# Altium PCB test.PcbDoc
Units mil, origin at the board's own origin, x right, y up, seen from the top; angles counter-clockwise.
Board outline 3937.01 x 6430.71 mil, 4 copper layers (Top Layer, Layer 2, Layer 3, Bottom Layer), stack 62.449 mil thick; 27 components, 27 nets, 265 pads, 32 vias.
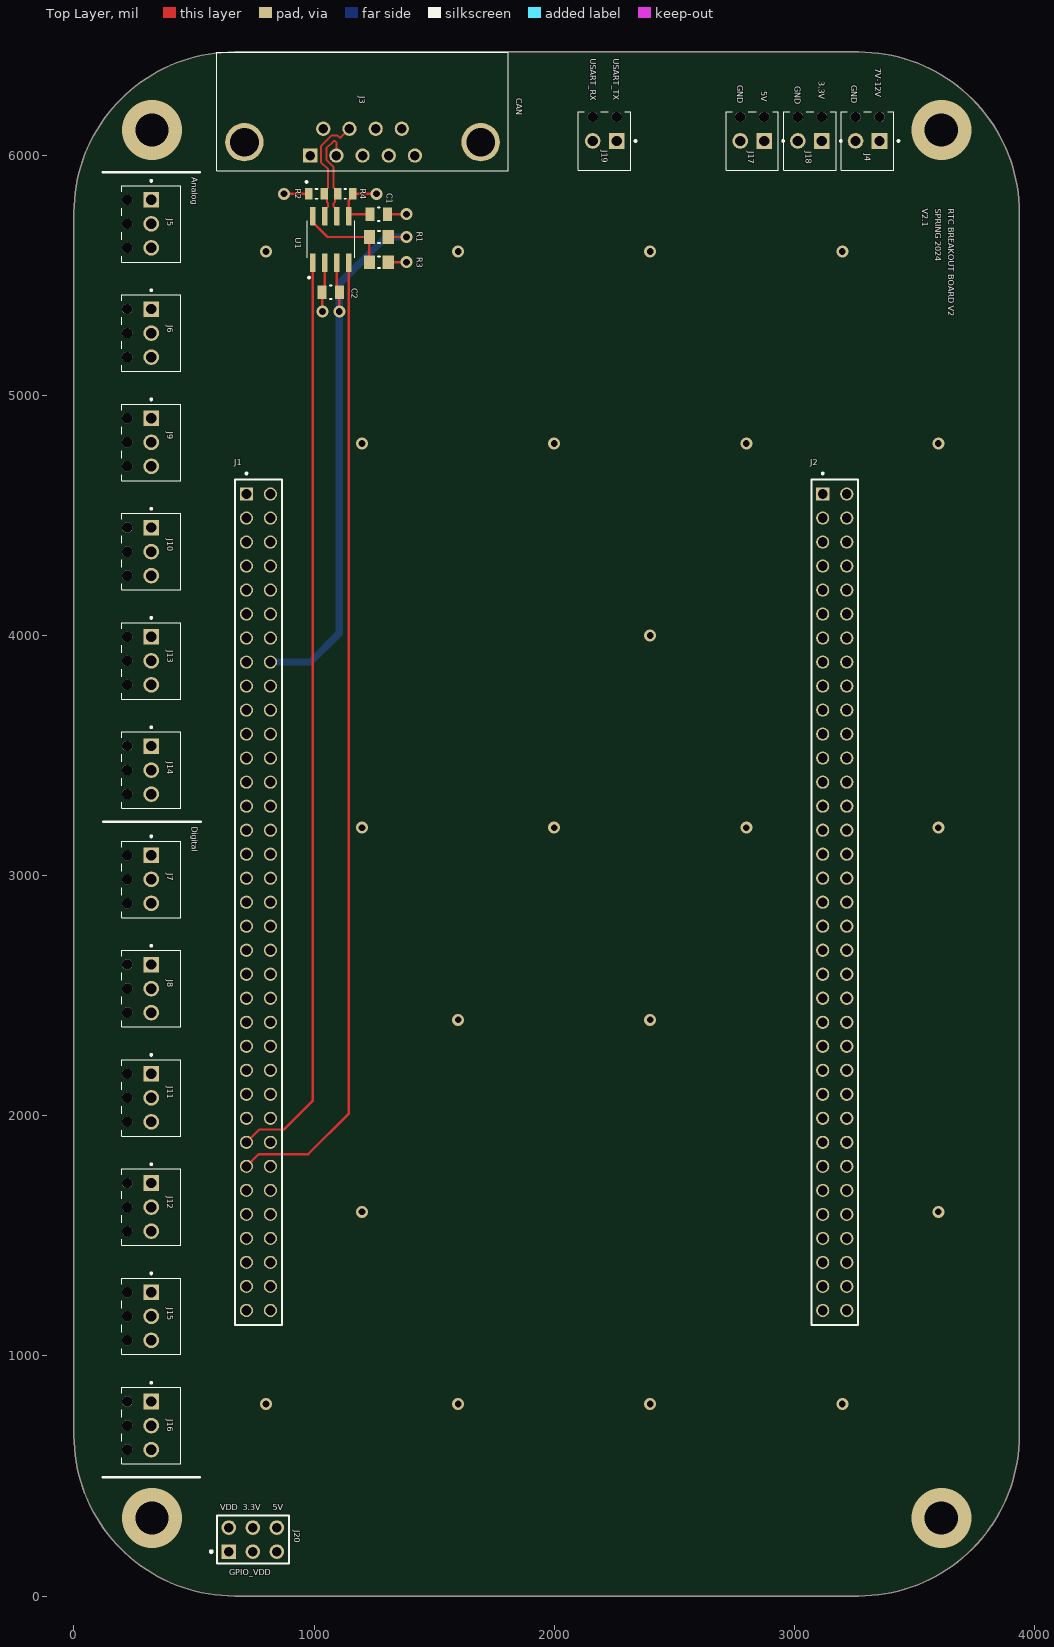
[diagram p0: Top Layer view]
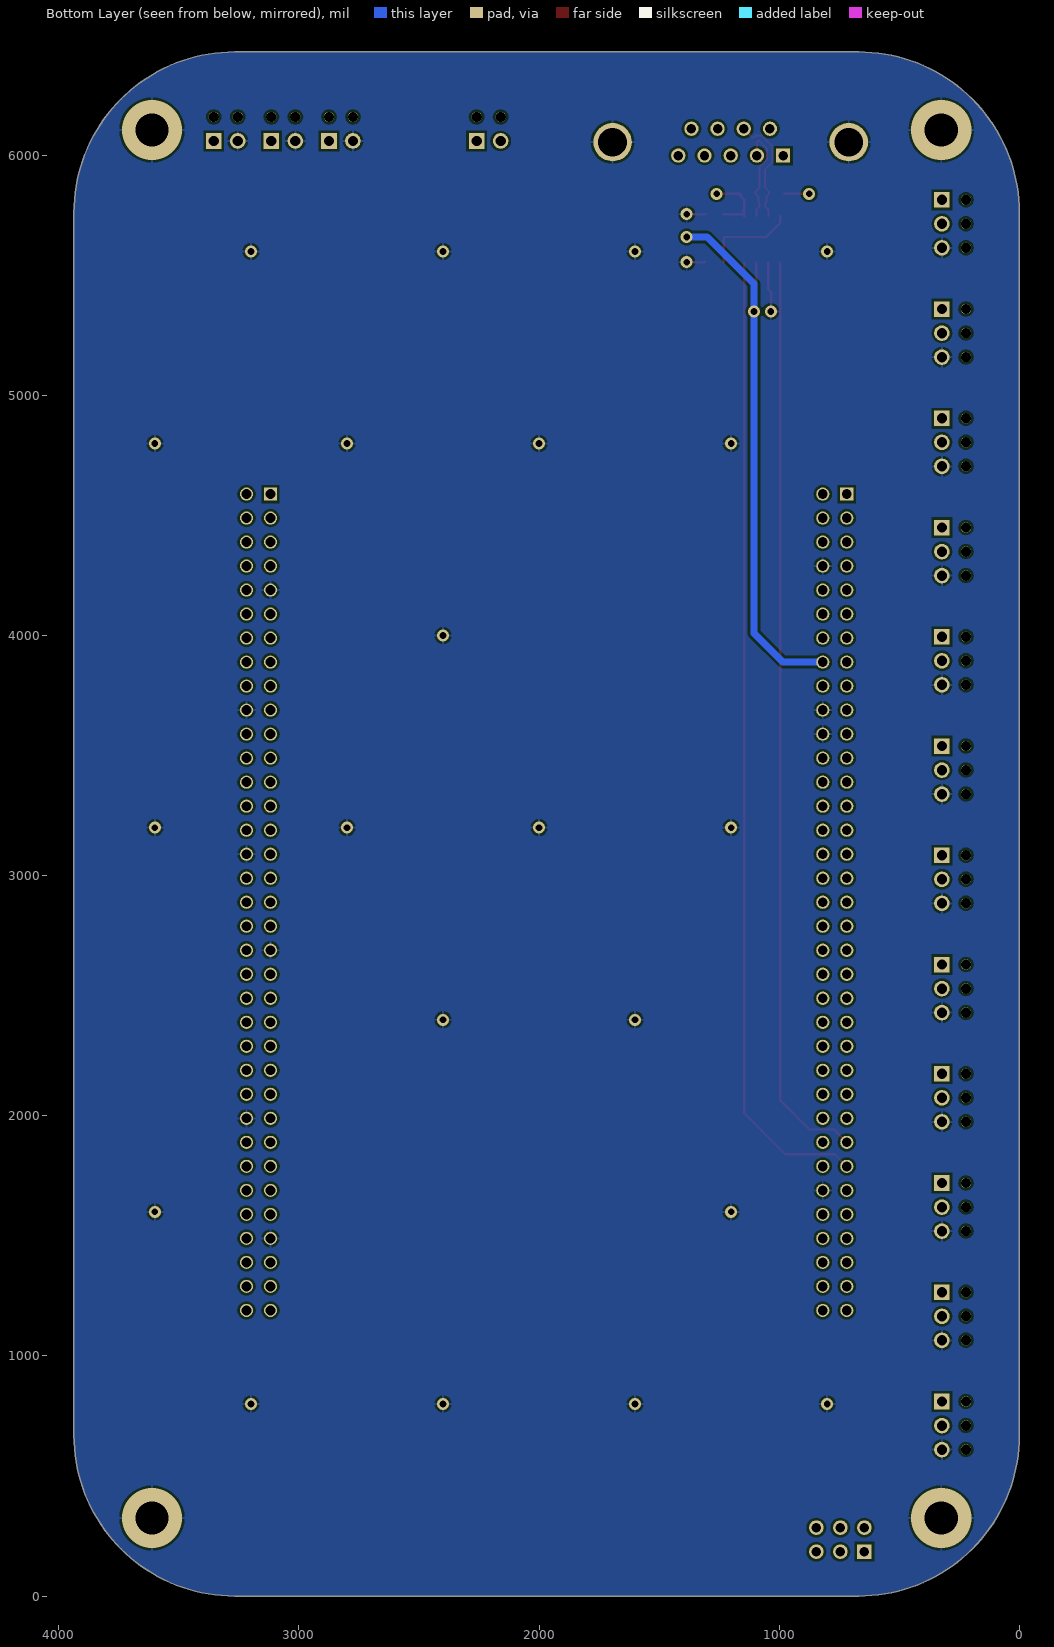
[diagram p1: Bottom Layer view, seen from below]
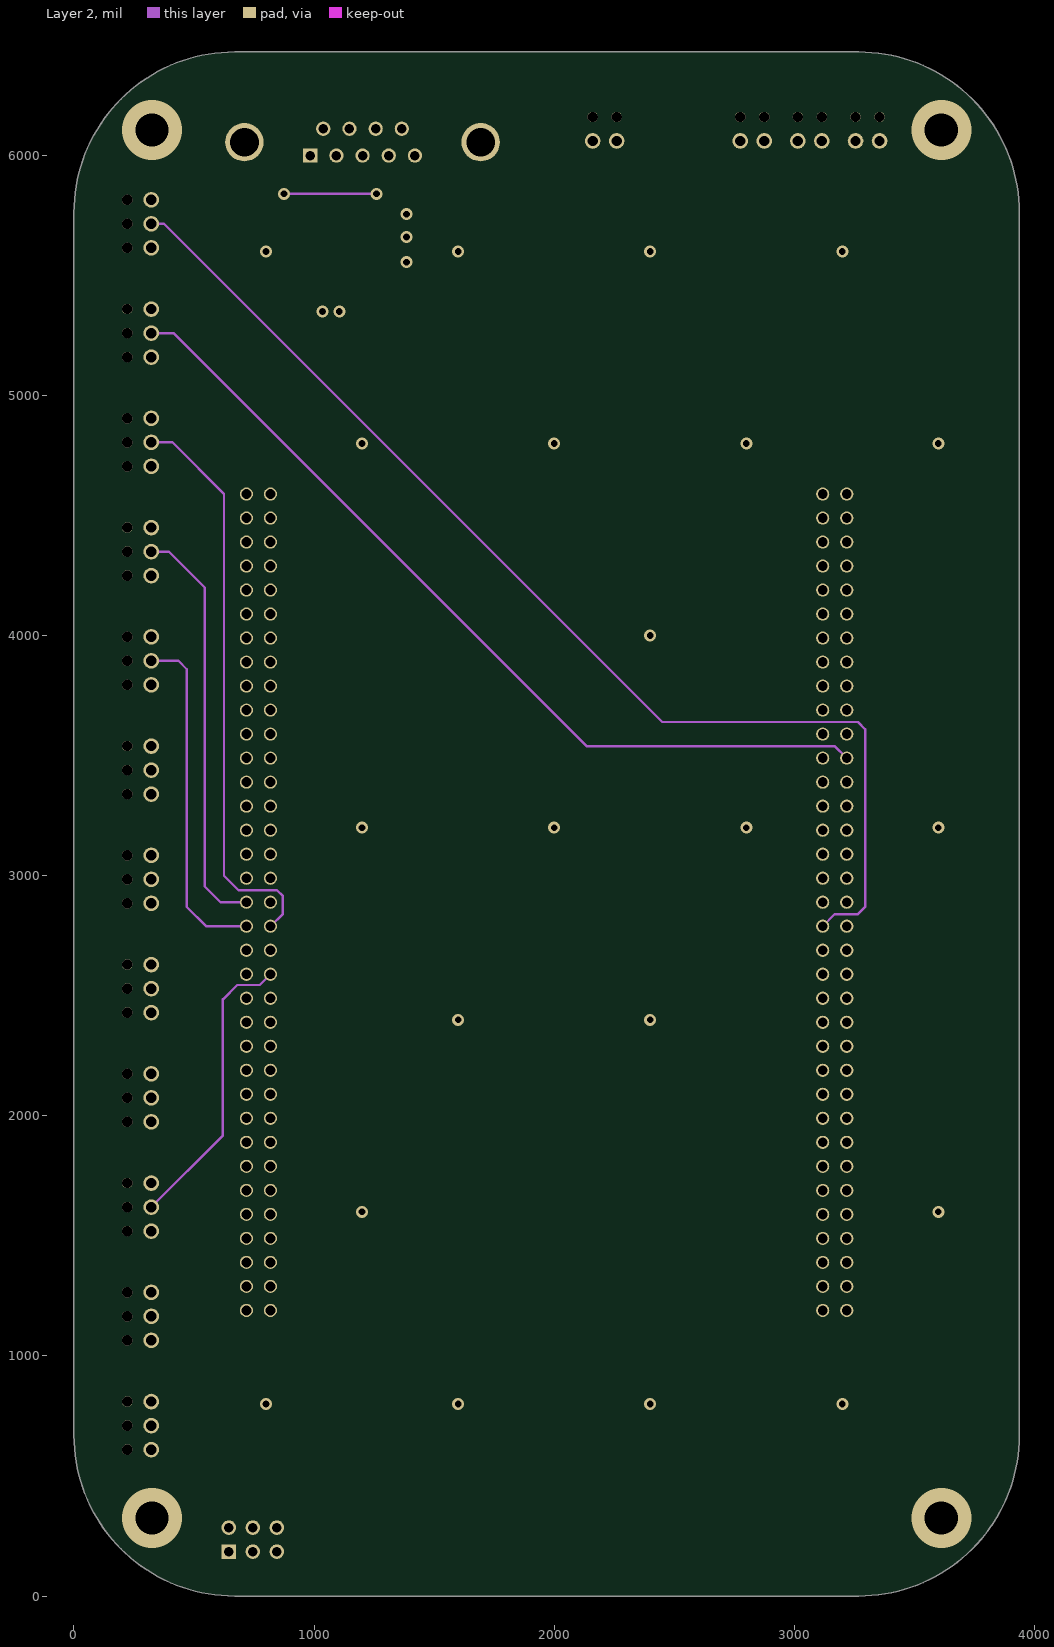
[diagram p2: Layer 2]
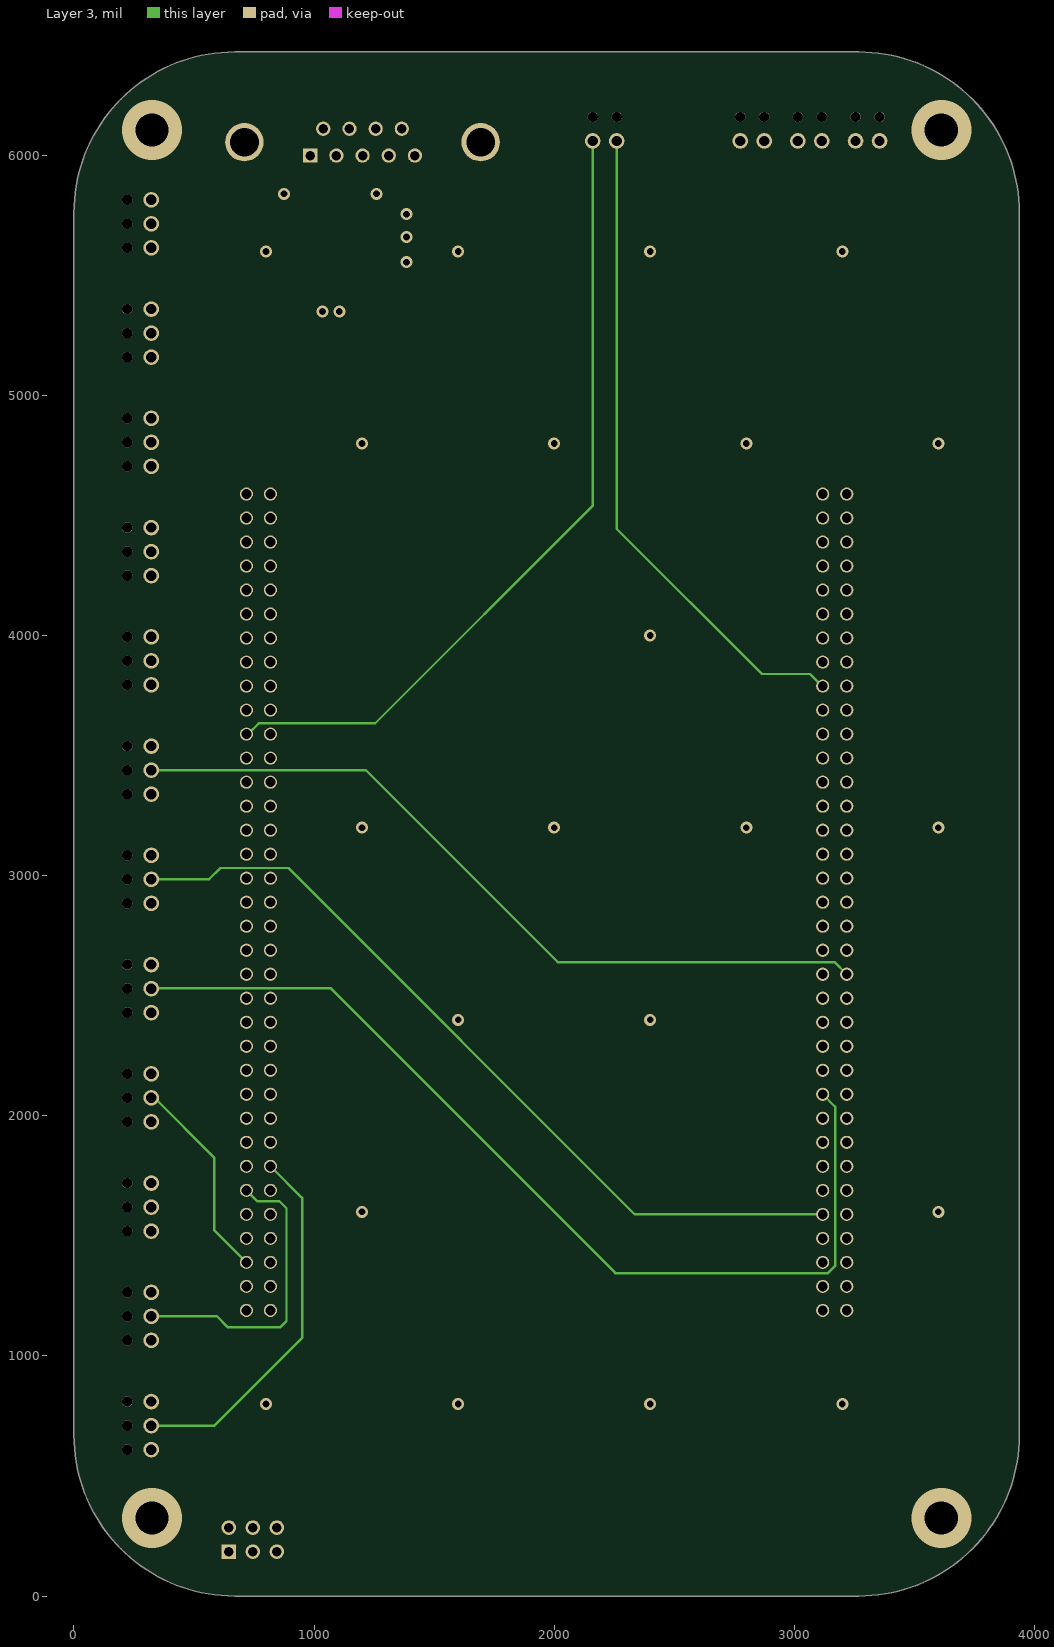
[diagram p3: Layer 3]
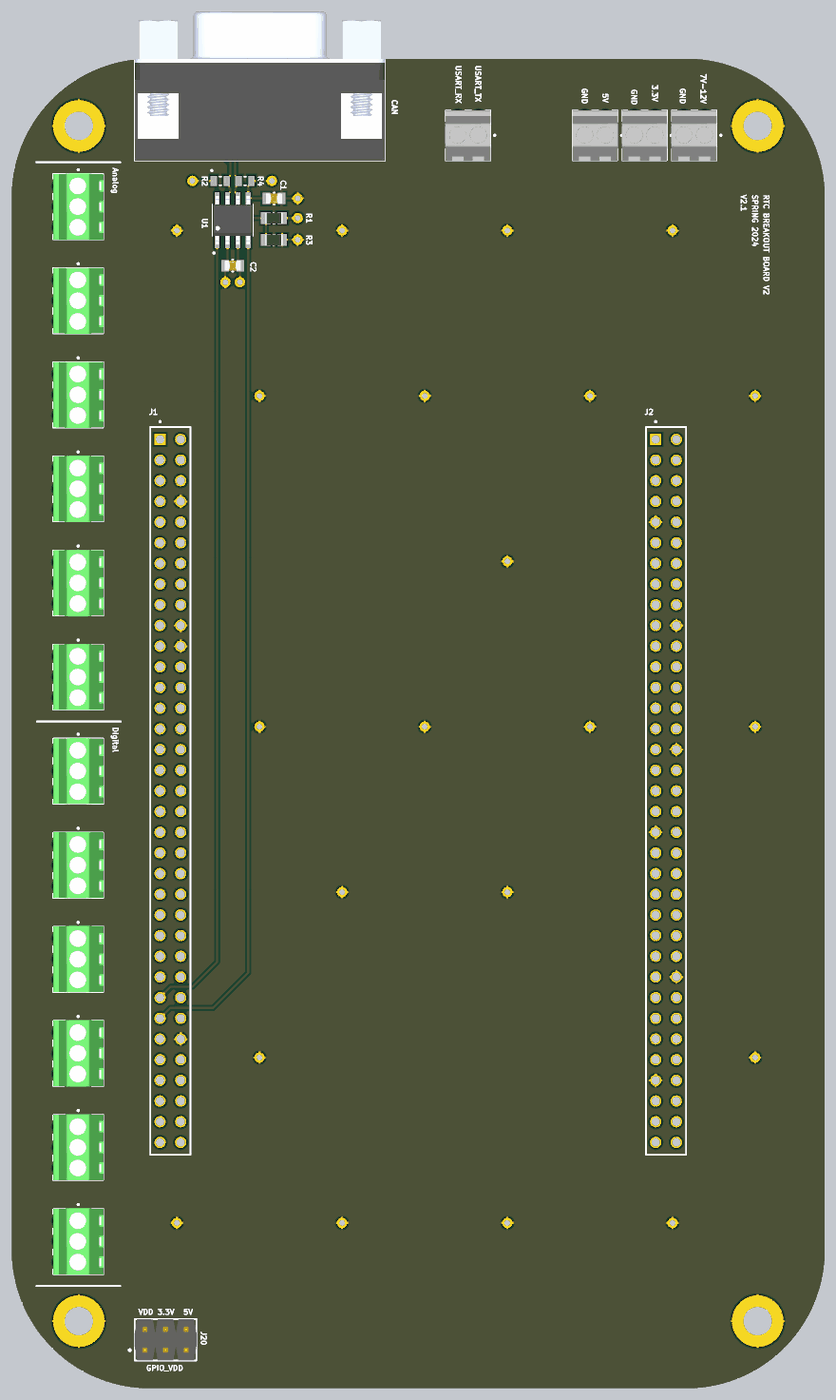
[diagram p4: 3D render of the assembled board from above, using the file's embedded part models]

## Layer stack, top to bottom
Top Solder: solder mask 0.4, Solder Resist, Dk 3.8
Top Layer: signal copper 1.378
Dielectric 4: prepreg 8.2835, PP-006, Dk 4.4
Layer 2: signal copper 0.5984
Dielectric 2: core 41.9291, Core-009, Dk 4.6
Layer 3: signal copper 0.5984
Dielectric 5: prepreg 8.2835, PP-006, Dk 4.4
Bottom Layer: signal copper 1.378
Bottom Solder: solder mask 0.4, Solder Resist, Dk 3.8

## Board outline
0,669.18 0,5761.44 cw(c669.27,5761.44) 669.27,6430.71 3267.74,6430.71 cw(c3267.69,5761.39) 3937.01,5761.52 3937.01,669.27 cw(c3267.82,669.18) 3267.82,0 669.27,0 cw(c669.32,669.32)

## Design rules (kind name [scope] priority, off if disabled: settings)
Clearance [All] p1: gap=10 ignorepadtopadclearanceinfootprint=FALSE
DiffPairsRouting [All] p1: maxlimit=15 minlimit=5 mostfreqgap=5 toplayer_mingap=15 toplayer_prefgap=15 toplayer_minwidth=8 toplayer_maxwidth=8 toplayer_prefwidth=8 midlayer1_maxgap=5 midlayer1_minwidth=2.23 midlayer1_maxwidth=2.23 midlayer1_prefwidth=2.23 midlayer2_maxgap=5 midlayer2_minwidth=2.23 midlayer2_maxwidth=2.23 midlayer2_prefwidth=2.23 bottomlayer_maxgap=5 bottomlayer_minwidth=3.77 bottomlayer_maxwidth=3.77 bottomlayer_prefwidth=3.77 impedanceprofiledriven=TRUE impedanceprofileid={686A30BB-4CB1-4C9A-A34D-1D43FEC1A34F} impedanceprofilevalue=120.000000 maxuncoupledlength=500
PlaneConnect [All] p1: planeconnectstyle=Direct reliefexpansion=20 reliefentries=4 reliefconductorwidth=10 reliefairgap=10
PolygonConnect [All] p1: connectstyle=Relief reliefconductorwidth=10 reliefentries=4 polygonreliefangle="90 Angle" airgapwidth=10
RoutingVias [All] p1: holewidth=28 width=50 viastyle="Through Hole" minholewidth=28 minwidth=50 maxholewidth=28 maxwidth=50
SolderMaskExpansion [All] p1: expansion=4 istentingtop=FALSE
SupplyNets "Schematic Supply Nets_2" [InNet('GPIO_VDD')] p1: voltage=0.000
SupplyNets "Schematic Supply Nets_1" [InNet('GND')] p2: voltage=0.000
SupplyNets "Schematic Supply Nets" [InNet('3V3')] p3: voltage=0.000
Width [All] p1: maxlimit=100 minlimit=10 preferedwidth=10 midlayer2_maxwidth=10 minimp=50.000000 maximp=50.000000 favimp=50.000000
28 further rules are at their usual default settings.

## Classes and differential pairs
differential pair CAN1: +CAN1_P -CAN1_N

## Components (designator, comment, footprint, x,y, rotation, side; value= is the part's Value field where it differs from the comment)
C1 "4700pF" FP-CC0805-0_85-MFG 1270,5755 r0 top value="4.7 nF"
C2 "0.1uF" FP-CC0805-0_85-MFG 1070,5430 r180 top value="100 nF"
J1 "SSW-135-21-G-D" SAMTEC_SSW-135-21-G-D 718.41,4589.59 r90 top
J2 "SSW-135-21-G-D" SAMTEC_SSW-135-21-G-D 3118.41,4589.59 r90 top
J3 "A-DF_09_A/KG-T2S" ASSMANN_A-DF09A/KG-T2S 1201.93,6055 r180 top locked
J4 "1725656" PHOENIX_1725656 3414.06,6182.05 r180 top
J5 "1725669" PHOENIX_1725669 200,5874.06 r270 top locked
J6 "1725669" PHOENIX_1725669 200,5419.06 r270 top locked
J7 "1725669" PHOENIX_1725669 200,3144.06 r270 top locked
J8 "1725669" PHOENIX_1725669 200,2689.06 r270 top locked
J9 "1725669" PHOENIX_1725669 200,4964.06 r270 top locked
J10 "1725669" PHOENIX_1725669 200,4509.06 r270 top locked
J11 "1725669" PHOENIX_1725669 200,2234.06 r270 top locked
J12 "1725669" PHOENIX_1725669 200,1779.06 r270 top locked
J13 "1725669" PHOENIX_1725669 200,4054.06 r270 top locked
J14 "1725669" PHOENIX_1725669 200,3599.06 r270 top locked
J15 "1725669" PHOENIX_1725669 200,1324.06 r270 top locked
J16 "1725669" PHOENIX_1725669 200,869.06 r270 top locked
J17 "1725656" PHOENIX_1725656 2934.06,6182.05 r180 top
J18 "1725656" PHOENIX_1725656 3174.06,6182.05 r180 top
J19 "1725656" PHOENIX_1725656 2319.06,6182.05 r180 top locked
J20 "90131-0763" FP-90131-0763-MFG 745,235 r0 top
R1 "1k" RESC2013X60X35ML10T20 1270,5660 r0 top
R2 "60.4" RESC2013X60X35LL10T20 1010,5840 r0 top
R3 "1k" RESC2013X60X35ML10T20 1270,5555 r180 top
R4 "60.4" RESC2013X60X35LL10T20 1130,5840 r0 top
U1 "SN65HVD230DR" SOIC127P599X175-8N 1070,5650 r90 top

## Footprints (in the part's own frame and the unit in brackets; to place one, negate y for a bottom-side part, rotate by r counter-clockwise, add the part's x,y. Pads: shape width x height; smd on the part's side, far side on the other; paste and mask are expansions set on the pad)
ASSMANN_A-DF09A/KG-T2S [mm]
  rect 1.508x1.508 hole 1: 1(5.54,1.42)
  round 1.508 hole 1: 2(2.77,1.42) 3(0,1.42) 4(-2.77,1.42) 5(-5.54,1.42) 6(4.155,-1.42) 7(1.385,-1.42) 8(-1.385,-1.42) 9(-4.155,-1.42)
  round 4.066 hole 3.05: S1(-12.495,0) S2(12.495,0)
  silkscreen extent -15.41,-9.5 15.41,4.3, body extent -15.41,-15.32 15.41,2.98, height 12.55
FP-90131-0763-MFG [mm]
  rect 1.55x1.55 hole 1 paste-2539.97 mask+0: 1(-2.54,-1.27)
  round 1.55 hole 1 paste-2539.97 mask+0: 2(-2.54,1.27) 3(0,-1.27) 4(0,1.27) 5(2.54,-1.27) 6(2.54,1.27)
  silkscreen extent -4.53,-2.54 3.81,2.54, body extent -3.91,-2.64 3.91,2.64, height 0.25
FP-CC0805-0_85-MFG [mm]
  rect 0.95x1.4 smd paste+0 mask+0: 1(-0.925,0) 2(0.925,0)
  silkscreen extent -0.08,-0.72 0.08,0.72, body extent -1.6,-1.05 1.6,1.05, height 0.25
PHOENIX_1725656 [mm]
  rect 1.65x1.65 / inner round 1.65 / far side rect 1.65x1.65 hole 1.1: 1(1.5,3.1)
  round 1.65 hole 1.1: 2(4.04,3.1)
  round 1.1 hole 1.1 unplated: ""(1.5,0.56) ""(4.04,0.56)
  silkscreen extent -0.6,0 5.54,6.2, body extent -0.02,0 5.58,6.2, height 8.51
PHOENIX_1725669 [mm]
  rect 1.65x1.65 / inner round 1.65 / far side rect 1.65x1.65 hole 1.1: 1(1.5,3.1)
  round 1.65 hole 1.1: 2(4.04,3.1) 3(6.58,3.1)
  round 1.1 hole 1.1 unplated: ""(1.5,0.56) ""(4.04,0.56) ""(6.58,0.56)
  silkscreen extent -0.6,0 8.08,6.2, body extent -0.04,0 8.1,6.2, height 8.51
RESC2013X60X35LL10T20 [mm] "Chip Resistor, 2-Leads, Body 2.00x1.25mm, IPC High Density"
  rect 0.8x1.25 smd: 1(-0.8,0) 2(0.8,0)
  silkscreen extent -0.1,-0.53 0.1,0.53, body extent -1.05,-0.67 1.05,0.67, height 0.6
RESC2013X60X35ML10T20 [mm] "Chip Resistor, 2-Leads, Body 2.1x1.35mm, IPC Low Density"
  rect 1.2x1.45 smd: 1(-1,0) 2(1,0)
  silkscreen extent -0.1,-0.63 0.1,0.63, body extent -1.05,-0.68 1.05,0.67, height 0.6
SAMTEC_SSW-135-21-G-D [mm]
  rect 1.39x1.39 / inner round 1.39 / far side rect 1.39x1.39 hole 1.04: 01(0,0)
  round 1.39 hole 1.04: 02(0,-2.54) 03(-2.54,0) 04(-2.54,-2.54) 05(-5.08,0) 06(-5.08,-2.54) 07(-7.62,0) 08(-7.62,-2.54) 09(-10.16,0) 10(-10.16,-2.54) 11(-12.7,0) 12(-12.7,-2.54) 13(-15.24,0) 14(-15.24,-2.54) 15(-17.78,0) 16(-17.78,-2.54) 17(-20.32,0) 18(-20.32,-2.54) 19(-22.86,0) 20(-22.86,-2.54) 21(-25.4,0) 22(-25.4,-2.54) 23(-27.94,0) 24(-27.94,-2.54) 25(-30.48,0) 26(-30.48,-2.54) 27(-33.02,0) 28(-33.02,-2.54) 29(-35.56,0) 30(-35.56,-2.54) 31(-38.1,0) 32(-38.1,-2.54) 33(-40.64,0) 34(-40.64,-2.54) 35(-43.18,0) 36(-43.18,-2.54) 37(-45.72,0) 38(-45.72,-2.54) 39(-48.26,0) 40(-48.26,-2.54) 41(-50.8,0) 42(-50.8,-2.54) 43(-53.34,0) 44(-53.34,-2.54) 45(-55.88,0) 46(-55.88,-2.54) 47(-58.42,0) 48(-58.42,-2.54) 49(-60.96,0) 50(-60.96,-2.54) 51(-63.5,0) 52(-63.5,-2.54) 53(-66.04,0) 54(-66.04,-2.54) 55(-68.58,0) 56(-68.58,-2.54) 57(-71.12,0) 58(-71.12,-2.54) 59(-73.66,0) 60(-73.66,-2.54) 61(-76.2,0) 62(-76.2,-2.54) 63(-78.74,0) 64(-78.74,-2.54) 65(-81.28,0) 66(-81.28,-2.54) 67(-83.82,0) 68(-83.82,-2.54) 69(-86.36,0) 70(-86.36,-2.54)
  silkscreen extent -87.89,-3.75 2.27,1.21
SOIC127P599X175-8N [mm]
  rrect25% 1.97x0.6 smd: 1(-2.47,1.905) 2(-2.47,0.635) 3(-2.47,-0.635) 4(-2.47,-1.905) 5(2.47,-1.905) 6(2.47,-0.635) 7(2.47,0.635) 8(2.47,1.905)
  silkscreen extent -4.14,-2.52 1.95,2.52, body extent -3,-2.45 3,2.45, height 1.75

## Part data
C1: library part CMP-1036-03591-2, "CAP CER 4700PF 50V X7R 0805", Capacitance="4.7 nF", Manufacturer=Yageo, Manufacturer Part Number=CC0805KRX7R9BB472, Package=CC0805-0.85, Temperature="-30°C to +85°C", Temperature Characteristic=X7R, Temperature Range High=+85°C, Temperature Range Low=-30°C, Tolerance=0.1, Voltage Rating="50 V", Automotive=No, Category=Cap, ComponentLink2Description=Datasheet, ComponentLink2URL=http://www.yageo.com/documents/recent/UPY-GPHC_Y5V_6.3V-to-50V_8.pdf, Device Class L1="Passive Components", Device Class L2=Capacitors, Device Class L3="Ceramic Capacitors", Digikey Description="CAP CER 4700PF 50V X7R 0805", Footprint Url=http://www.yageo.com/exep/pages/download/literatures/UPY-C_GEN_24.pdf, Height=0.95mm, Ipc Land Pattern Name=CAPC200125X85, Lead Free=Yes, Material=Ceramic, Mouser Description="Multilayer Ceramic Capacitors MLCC - SMD/SMT 4.7nF 50V X7R 10%", Octopart=https://octopart.com/cc0805krx7r9bb472-yageo-192986, RoHS=TRUE
C2: library part CMP-2100-03606-3, "CAP CER 0.1UF 50V X7R 0805", Capacitance="100 nF", Manufacturer=Yageo, Manufacturer Part Number=CC0805KRX7R9BB104, Package=CC0805-0.85, Temperature="-30°C to +85°C", Temperature Characteristic=X7R, Temperature Range High=+85°C, Temperature Range Low=-30°C, Tolerance=0.1, Voltage Rating="50 V", Automotive=No, Category=Cap, ComponentLink2Description=Datasheet, ComponentLink2URL=http://www.yageo.com/documents/recent/UPY-GPHC_Y5V_6.3V-to-50V_8.pdf, Device Class L1="Passive Components", Device Class L2=Capacitors, Device Class L3="Ceramic Capacitors", Digikey Description="CAP CER 0.1UF 50V X7R 0805", Footprint Url=http://www.yageo.com/exep/pages/download/literatures/UPY-C_GEN_24.pdf, Height=0.95mm, Ipc Land Pattern Name=CAPC200125X85, Lead Free=Yes, Material=Ceramic, Mouser Description="Multilayer Ceramic Capacitors MLCC - SMD/SMT 100nF 50V X7R 10%", Octopart=https://octopart.com/cc0805krx7r9bb104-yageo-192993, RoHS=TRUE
J1 J2: Package=None, Availability=Unavailable, MF="{'manufacturer': u'Samtec Inc.'}", MP=SSW-135-21-G-D, Price=None
J3: "9 Position D-Sub Receptacle, Female Sockets Connector", Package=None, Availability=Unavailable, Check_prices=https://www.snapeda.com/parts/A-DF%2009%20A/KG-T2S/Assmann%20WSW%20Components/view-part/2761262/?ref=eda, MF="Assmann WSW", MP="A-DF 09 A/KG-T2S", Price=None, SnapEDA_Link=https://www.snapeda.com/parts/A-DF%2009%20A/KG-T2S/Assmann%20WSW%20Components/view-part/2761262/?ref=snap
J4 J17 J18 J19: "PCB Terminal Screw 2.54mm 20AWG 160V 6A 2 Position COMBICON MPT Series", Package=None, Check_prices=https://www.snapeda.com/parts/1725656/Phoenix+Contact/view-part/?ref=eda, MF="Phoenix Contact", MP=1725656, SnapEDA_Link=https://www.snapeda.com/parts/1725656/Phoenix+Contact/view-part/?ref=snap
J5 J6 J7 J8 J9 J10 J11 J12 J13 J14 J15 J16: "Vis de borne PCB 2,54 mm 20AWG 160V 6A 3 positions COMBICON MPT Series", Package=None, Check_prices=https://www.snapeda.com/parts/1725669/Phoenix+Contact/view-part/?ref=eda, MF="Phoenix Contact", MP=1725669, SnapEDA_Link=https://www.snapeda.com/parts/1725669/Phoenix+Contact/view-part/?ref=snap
J20: library part CMP-00257-00655468-1, "90131-0763 Conn Unshrouded Header HDR 6 POS 2.54mm Solder ST Top Entry Thru-Hole C-Grid III™ Tray", Contact Resistance=20mΩ, Current Rating=3A, Housing Color=Black, Insulation Resistance=5GΩ, Manufacturer Lifecycle Status=ACTIVE, Max Operating Temperature=125°C, Min Operating Temperature=-55°C, Voltage Rating=350V, Contact Material=Brass, Contact Plating=Gold, Country of Origin=SG, Gender=Male, Height=9.65mm, Housing Material=Polyester, Lead Free="Lead Free", Lead Pitch=2.54mm, Lifecycle Status=Production, Material="Glass, Polyester", Mount="Through Hole", NexarPartId=655468, Number of Circuits=6, Number of Contacts=6, Number of Poles=6, Number of Positions=6, Number of Rows=2, Orientation=Vertical, Pitch=2.54mm, Plating=Tin, Radiation Hardening=No, REACH SVHC=Unknown, RoHS=Compliant, Schedule B=8536694040, Termination="Through Hole", Voltage Rating (AC)=350V, Voltage Rating (DC)=350V, Working Voltage=350V
R1 R3: library part CMP-2100-03671-1, "Chip Resistor, 1 KOhm, +/- 1%, 125 mW, -55 to 155 degC, 0805 (2012 Metric), RoHS, Tape and Reel", Case Code (Imperial)=0805, Case Code (Metric)=2012, Manufacturer=Yageo, Max Operating Temperature=155degC, Max Power Dissipation=125mW, Min Operating Temperature=-55degC, Package Description="2-Pin Surface Mounted Device, Body 2 x 1.25 mm", Package Quantity=1, Resistance=1KOhm, Temperature Coefficient=100ppm/degreesC, Tolerance=1%, Voltage Rating=150V, Case/Package=0805, Composition=ThickFilm, Datasheet URL=http://www.yageo.com/NewPortal/yageodocoutput?fileName=/pdf/R-Chip/PYu-RC_Group_51_RoHS_L_5.pdf, Datasheet Version="Rev. 5, 10/2016", Depth=1.25mm, Height=0.024inch, Lead Free=LeadFree, Length=0.079inch, Manufacturer URL=http://www.yageo.com/, Military Standard=Not, Number of Pins=2, Number of Terminations=2, Package Reference=0805, Packaging=TapeandReel, Power Rating=125mW, REACH SVHC=Unknown, RoHSCompliant=true, Termination=SMD/SMT, Voltage Rating (DC)=150V, Width=0.049inch
R2 R4: library part CMP-2001-01223-1, Manufacturer=Yageo, Part Number=RC0805FR-0760R4L
U1: "3.3 V CAN Transceiver with Standby Mode 8-SOIC -40 to 85", Package="SOIC-8 Texas Instruments", Arrow_Electronics-Purchase-URL=https://snapeda.com/shop?store=Arrow+Electronics&id=51767, Availability=Good, DigiKey-Purchase-URL=https://snapeda.com/shop?store=DigiKey&id=51767, MF="Texas Instruments", Mouser-Purchase-URL=https://snapeda.com/shop?store=Mouser&id=51767, MP=SN65HVD230DR, Price=None, SnapEDA_Link=https://www.snapeda.com/parts/SN65HVD230DR/Texas%20Instruments/view-part/51767/?ref=snap, Texas_Instruments-Purchase-URL=https://snapeda.com/shop?store=Texas+Instruments&id=51767

## Via types
v1: diameter 50, hole 28, Top Layer to Bottom Layer, 28 vias
v2: diameter 250, hole 137.8, Top Layer to Bottom Layer, 4 vias

## Nets (pads, with @x,y where several pads share a name; then routed paths per layer and width w, separated by ;. In a path a pad name is that pad's centre, name@x,y a point inside that pad or via, vN(x,y) a via of type N, cw(c..) or ccw(c..) an arc to the next point about the centre after c; other vN are vias at no path point)
3V3: C2.1 J1.16 J18.1 J20.4 R1.2 U1.3 | length 2435.9
  Top Layer w10: U1.3 1095,5441.42 C2.1 1105,5428.58 v1(1105,5350) ; R1.2 v1(1385,5660)
  Bottom Layer w30: J1.16 984.59,3889.59 1105,4010 v1(1105,5350) 1105,5465 1300,5660 v1(1385,5660)
5V: J1.18 J20.6
5V_EXT: J1.06 J17.1
CAN1_N: J3.2 R4.1 U1.6 | length 426.4
  Top Layer w8: J3.2 1092.87,6054.52 1088.19,6059.21 1081.56,6059.21 1051.19,6028.84 1051.19,5981.83 1081.5,5951.52 1081.5,5865.29 1086.19,5860.61 1086.76,5860.61 1098.5,5848.86 R4.1 1086.76,5828.25 1086.76,5805.26 1081.5,5800 1081.5,5786.71 1086.19,5782.02 1087.19,5782.02 1095,5774.21 U1.6
CAN1_P: J3.7 R2.2 U1.7 | length 479.5
  Top Layer w8: U1.7 1045,5774.21 1052.81,5782.02 1053.81,5782.02 1058.5,5786.71 1058.5,5800 1053.24,5805.26 1053.24,5828.25 R2.2 1041.5,5848.86 1053.24,5860.61 1053.81,5860.61 1058.5,5865.29 1058.5,5941.99 1028.19,5972.3 1028.19,6038.36 1072.03,6082.21 1097.71,6082.21 1104.9,6075.03 1111.52,6075.03 J3.7
CAN_RX: J1.57 U1.4 | length 4060.6
  Top Layer w10: J1.57 768.82,1840 975,1840 1145,2010 U1.4
CAN_TX: J1.55 U1.1 | length 3837.9
  Top Layer w10: J1.55 771.82,1943 874.57,1943 995,2063.43 U1.1
GND: C1.2 C2.2 J1.08 J1.20 J1.22 J1.60 J2.09 J2.20 J2.32 J2.39 J2.54 J2.63 J3.S1 J3.S2 J4.2 J5.3 J6.3 J7.3 J8.3 J9.3 J10.3 J11.3 J12.3 J13.3 J14.3 J15.3 J16.3 J17.2 J18.2 R3.1 U1.2 | length 362.3
  Top Layer w10: v1(1035,5350) 1033.58,5351.42 C2.2 1045,5441.42 U1.2 ; C1.2 v1(1385,5755) ; R3.1 v1(1385,5555)
  other v1: 800,800 1600,800 2400,800 3200,800 1200,1600 3600,1600 1600,2400 2400,2400 1200,3200 2000,3200 2800,3200 3600,3200 2400,4000 1200,4800 2000,4800 2800,4800 3600,4800 800,5600 1600,5600 2400,5600 3200,5600
  other v2: 325,325 3612.14,325 325,6105.71 3612.14,6105.71
GPIO_VDD: J5.1 J6.1 J7.1 J8.1 J9.1 J10.1 J11.1 J12.1 J13.1 J14.1 J15.1 J16.1 J20.1 J20.3 J20.5
NetC1_1: C1.1 R2.1 R4.2 U1.5 | length 782.1
  Top Layer w10: v1(875,5840) R2.1 ; U1.5 U1.5@1145,5748.19 ; C1.1 1151.81,5755 U1.5@1145,5748.19 ; v1(1260,5840) R4.2 1161.5,5831.14 1145,5814.65 1145,5775 1150,5770 1145,5765 U1.5@1145,5748.19
  Layer 2 w10: v1(875,5840) v1(1260,5840)
NetR1_1: R1.1 R3.2 U1.8 | length 392.6
  Top Layer w10: U1.8 995,5720.28 1055.28,5660 R1.1 R3.2
PA3: J2.37 J5.2 | length 4794.8
  Layer 2 w10: J5.2 375,5715 2450,3640 3265,3640 3295,3610 3295,2870 3265,2840 3168.82,2840 J2.37
PB1: J2.24 J6.2 | length 3629.7
  Layer 2 w10: J6.2 415,5260 2135,3540 3168.01,3540 J2.24
PC0: J1.38 J9.2 | length 2409
  Layer 2 w10: J9.2 410,4805 625,4590 625,3000 685.4,2939.6 845.4,2939.6 870,2915 870,2841.18 J1.38
PC2: J1.35 J10.2 | length 1730.6
  Layer 2 w10: J10.2 395,4350 545,4200 545,2955 610.41,2889.59 J1.35
PC3: J1.37 J13.2 | length 1425.6
  Layer 2 w10: J13.2 435,3895 470,3860 470,2870 550,2790 J1.37@710,2790
PE14: J2.51 J8.2 | length 4088.8
  Layer 3 w10: J8.2 324,2531.96 1068.04,2531.96 2255,1345 3140,1345 3170,1375 3170,2038.01 J2.51
PF10: J2.42 J14.2 | length 3248.6
  Layer 3 w10: J14.2 1215,3440 2015,2640 3168.01,2640 J2.42
PG0: J1.59 J15.2 | length 1271.2
  Layer 3 w10: J15.2 595,1165 640,1120 860,1120 885,1145 885,1615 855,1645 763.01,1645 733.02,1674.99 729.99,1674.99 725,1670 718.41,1676.59 J1.59
PG1: J1.58 J16.2 | length 1593.2
  Layer 3 w10: J16.2 585,710 950,1075 950,1658.01 J1.58@820,1788.01 ; J1.58@809.41,1780.59 820,1770 J1.58@820,1788.01 ; J1.58 J1.58@820,1788.01 ; J1.58@820,1800 J1.58@820,1788.01
PG2: J1.42 J12.2 | length 1230.2
  Layer 2 w10: J12.2 620,1917.95 620,2485 680,2545 773.82,2545 J1.42
PG12: J1.65 J11.2 | length 857.2
  Layer 3 w10: J11.2 335,2075 585,1825 585,1523.01 J1.65
PG14: J2.61 J7.2 | length 3413.3
  Layer 3 w10: J7.2 562.96,2985 609.92,3031.96 893.04,3031.96 2335.41,1589.59 J2.61
USART_A_RX: J1.21 J19.2 | length 3355.3
  Layer 3 w10: J1.21 724.59,3589.59 770,3635 1255,3635 2160,4540 J19.2
USART_A_TX: J2.17 J19.1 | length 2764.9
  Layer 3 w10: J19.1 2260,4445 2865,3840 3065,3840 J2.17@3131.65,3773.35
VDD: J1.05 J20.2
VIN: J1.24 J4.1
pads on no net: J1.01 J1.02 J1.03 J1.04 J1.07 J1.09 J1.10 J1.11 J1.12 J1.13 J1.14 J1.15 J1.17 J1.19 J1.23 J1.25 J1.26 J1.27 J1.28 J1.29 J1.30 J1.31 J1.32 J1.33 J1.34 J1.36 J1.39 J1.40 J1.41 J1.43 J1.44 J1.45 J1.46 J1.47 J1.48 J1.49 J1.50 J1.51 J1.52 J1.53 J1.54 J1.56 J1.61 J1.62 J1.63 J1.64 J1.66 J1.67 J1.68 J1.69 J1.70 J2.01 J2.02 J2.03 J2.04 J2.05 J2.06 J2.07 J2.08 J2.10 J2.11 J2.12 J2.13 J2.14 J2.15 J2.16 J2.18 J2.19 J2.21 J2.22 J2.23 J2.25 J2.26 J2.27 J2.28 J2.29 J2.30 J2.31 J2.33 J2.34 J2.35 J2.36 J2.38 J2.40 J2.41 J2.43 J2.44 J2.45 J2.46 J2.47 J2.48 J2.49 J2.50 J2.52 J2.53 J2.55 J2.56 J2.57 J2.58 J2.59 J2.60 J2.62 J2.64 J2.65 J2.66 J2.67 J2.68 J2.69 J2.70 J3.1 J3.3 J3.4 J3.5 J3.6 J3.8 J3.9 J4. J5. J6. J7. J8. J9. J10. J11. J12. J13. J14. J15. J16. J17. J18. J19.

## Polygon pours and split planes (outlines as drawn)
GND on Bottom Layer "GND_L06_P001" (solid, pour order 1): 0,669.18 0,5761.44 cw(c669.27,5761.44) 669.27,6430.71 3267.74,6430.71 cw(c3267.69,5761.39) 3937.01,5761.52 3937.01,669.27 cw(c3267.82,669.18) 3267.82,0 669.27,0 cw(c669.32,669.32)
GND on Top Layer "NONET_L01_P000" (solid, shelved, pour order 0): 0,669.18 0,5761.44 cw(c669.27,5761.44) 669.27,6430.71 3267.74,6430.71 cw(c3267.69,5761.39) 3937.01,5761.52 3937.01,669.27 cw(c3267.82,669.18) 3267.82,0 669.27,0 cw(c669.32,669.32)

## Silkscreen, mask and mechanical layers (free items; w line width, h text height)
Top Overlay:
  lines w10: 120,495 525,495 ; 120,5930 525,5930 ; 122.5,3225 527.5,3225
  text "USART_RX" at 2151.17,6403 h25 r270
  text "USART_TX" at 2246.17,6403 h25 r270
  text "7V-12V" at 3337,6363 h25 r270
  text "3.3V" at 3102,6308.83 h25 r270
  text "GND" at 2762,6293 h25 r270
  text "GND" at 3237,6293 h25 r270
  text "GND" at 3002,6288 h25 r270
  text "5V" at 2862,6268 h25 r270
  text "CAN" at 1842,6238 h25 r270
  text "Analog" at 490.33,5908 h25 r270
  text "V2.1" at 3532,5778 h25 r270
  text "SPRING 2024" at 3587,5778 h25 r270
  text "RTC BREAKOUT BOARD V2" at 3642,5778 h25 r270
  text "Digital" at 490.33,3203 h25 r270
  text "VDD" at 609.5,357.46 h25
  text "3.3V" at 702,357 h25
  text "5V" at 827,357 h25
  text "GPIO_VDD" at 647,86.17 h25